# EAGLE board Qi-Receiver1.2 (EAGLE 9.6.2)
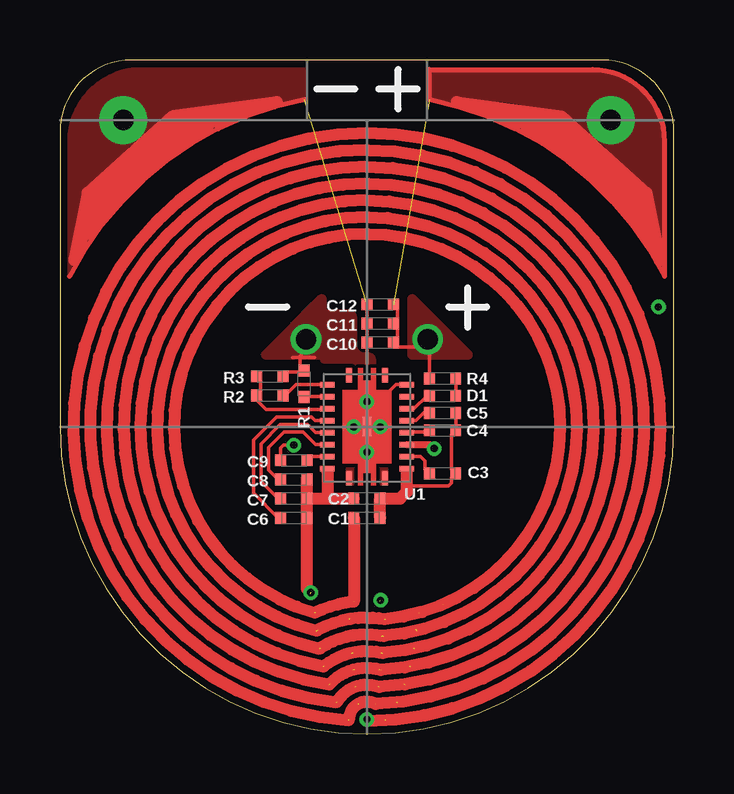
[diagram p0: board, top side]
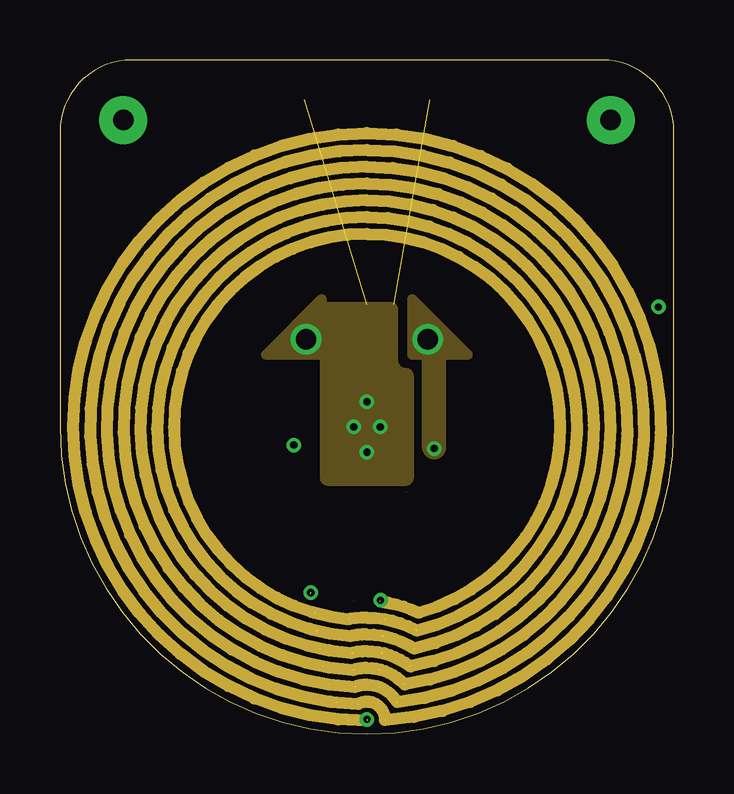
[diagram p1: board, inner layer Route2]
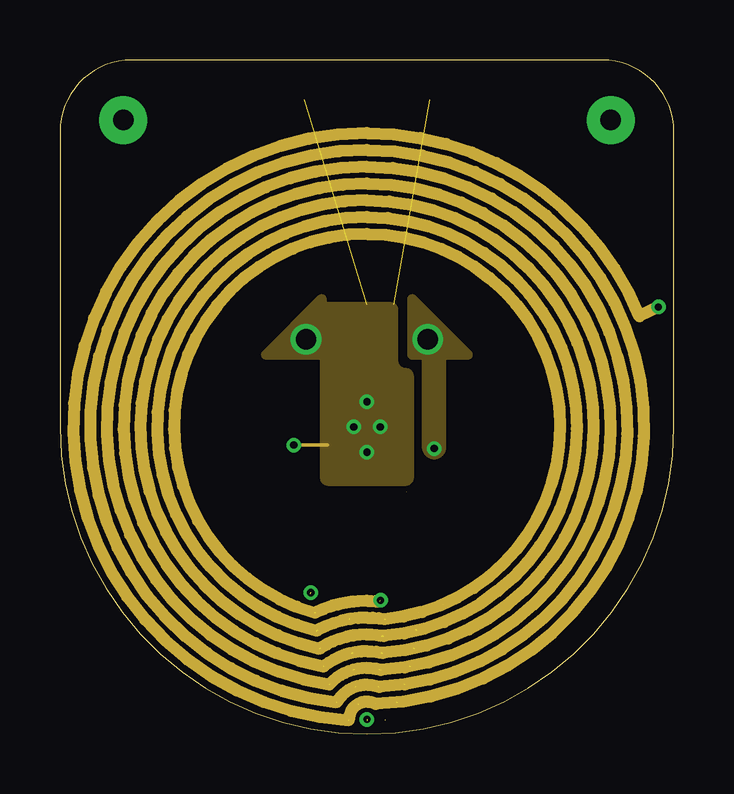
[diagram p2: board, inner layer Route15]
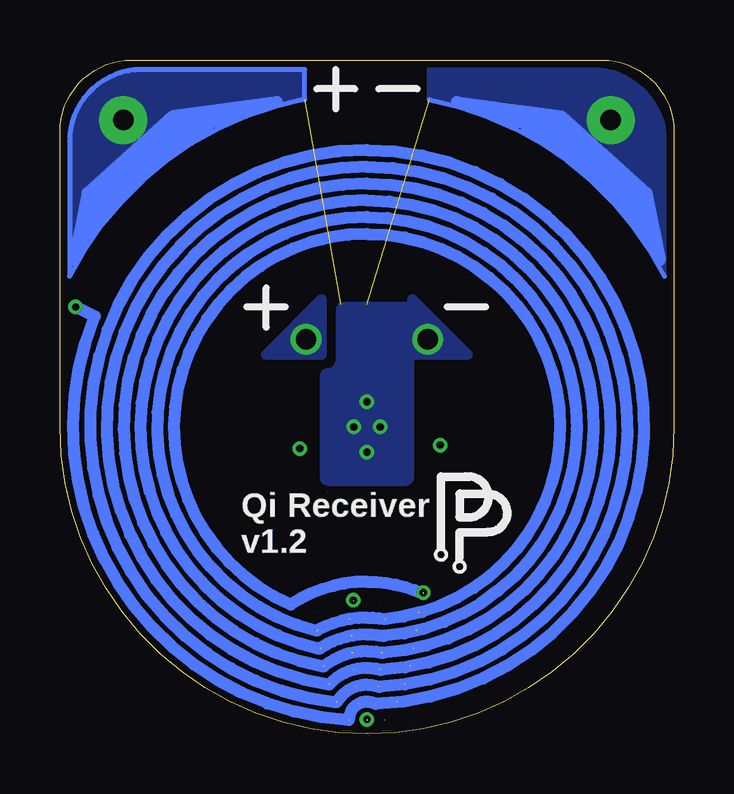
[diagram p3: board, bottom side, seen from below]

Size 25.6 x 28.1 mm. Coordinates in mm from the lower left corner, seen from the top.
Outline: 25.6,12.8 25.6,25.1 arc90 22.6,28.1 3,28.1 arc90 0,25.1 0,12.8 arc90 12.8,0 arc90 25.6,12.8
Copper layers (1+2*15+16): Top 0.035mm / dielectric 10mil / Route2 0.035mm / dielectric 40mil / Route15 0.035mm / dielectric 10mil / Bottom 0.035mm
Design rules "PCBWay_Rigid4Layer": minimum track width 6mil, minimum drill 0.3mm, track to track 6mil, track to pad 6mil, pad to pad 6mil, via to via 6mil, smd to smd 6mil, copper to edge 0.3mm, drill to drill 6mil, minimum pad ring 6mil, minimum via ring 6mil, stop-mask expansion 0.05mm, vias tented up to drill 2mil, thermal gap 10mil

## Footprints (pad centres in the part's own frame; a part is rotated, then mirrored left to right if it is on the bottom)
0402-SMT = smd 0.5 x 0.5: P$1 -0.55,0; P$2 0.55,0
BQ51013A = smd 0.6 x 0.24: AC1 -1.65,1.75; AC2 1.65,1.75; AD -1.65,-1.75; AD-EN -1.65,-1.25; BOOT1 -1.65,1.25; BOOT2 1.65,0.75; CHG -1.65,-0.75; CLMP1 -1.65,0.25; CLMP2 1.65,0.25; COM1 -1.65,-0.25; COM2 1.65,-0.25; FOD 1.65,-0.75; ILIM 1.65,-1.75; OUT -1.65,0.75; RECT 1.65,1.25; TS-CTRL 1.65,-1.25 | smd 0.24 x 0.6: EN1 -0.75,-2.15; EN2 0.75,-2.15; PGND1 -0.75,2.15; PGND20 0.75,2.15 | smd 0.4 x 0.8: THERM 0,0

## Placement (x,y rotation side)
C1  TBD  [0402-SMT]  12.8,9.01 180 top
C2  TBD  [0402-SMT]  12.8,9.81 180 top
C3  10nF  [0402-SMT]  15.95,10.86 180 top
C4  470nF  [0402-SMT]  15.95,12.66 180 top
C5  47nF  [0402-SMT]  15.95,13.39 180 top
C6  47nF  [0402-SMT]  9.75,9.01 180 top
C7  470nF  [0402-SMT]  9.75,9.81 180 top
C8  10nF  [0402-SMT]  9.75,10.61 180 top
C9  10uF  [0402-SMT]  9.75,11.41 180 top
C10  TBD  [0402-SMT]  13.35,16.31 0 top
C11  TBD  [0402-SMT]  13.35,17.11 0 top
C12  TBD  [0402-SMT]  13.35,17.91 0 top
D1  0402-LED  [0402-SMT]  15.95,14.1 180 top
R1  10kΩ  [0402-SMT]  10.18,14.6 270 top
R2  140Ω  [0402-SMT]  8.75,14.11 0 top
R3  140Ω  [0402-SMT]  8.75,14.91 180 top
R4  1000Ω  [0402-SMT]  15.95,14.82 180 top
U1  BQ51013A  [BQ51013A]  12.8,12.81 180 top

## Library data of the parts
C1-C12 D1 R1-R4 U1 = Qi_Charger

## Nets
AC1: C1.P$1 C2.P$1 C3.P$1 C4.P$1 C5.P$1 U1.AC1
AC2: C1.P$2 C2.P$2 C6.P$1 C7.P$1 C8.P$1 U1.AC2
BOOT1: C3.P$2 U1.BOOT1
BOOT2: C8.P$2 U1.BOOT2
CHG: D1.P$2 U1.CHG
CLMP1: C4.P$2 U1.CLMP1
CLMP2: C7.P$2 U1.CLMP2
COM1: C5.P$2 U1.COM1
COM2: C6.P$2 U1.COM2
FOD: R2.P$1 R3.P$2 U1.FOD
GND: C9.P$2 C10.P$1 C11.P$1 C12.P$1 R1.P$1 R3.P$1 U1.AD U1.PGND1 U1.PGND20 U1.THERM
ILIM: R2.P$2 U1.ILIM
N$1: R1.P$2 U1.TS-CTRL
N$2: D1.P$1 R4.P$1
OUT: C10.P$2 C11.P$2 C12.P$2 R4.P$2 U1.OUT
RECT: C9.P$1 U1.RECT

## Tracks (layer width: path | path; a pad name or v marks a point on that pad's centre or on a via)
AC1  (1 unrouted)
  Top 0.152: C5.P$1 C4.P$1 16.32,12.49 16.32,11.04 C3.P$1 16.32,10.69 16.32,10.47 16.2,10.35 14.5,10.35 14.45,10.4 | U1.AC1 14.45,10.93
  Top 0.5: 14.45,10.08 14.18,9.81 C2.P$1 C1.P$1 | 14.45,10.93 14.45,10.4 14.45,10.09
AC2  (via drill 0.3)  (60 unrouted)
  Top 0.152: U1.AC2 11.15,10.93
  Top 0.5: 11.15,10.93 11.15,9.81 C2.P$2 C7.P$1 | C1.P$2 12.25,5.52 | 12.8,0.55 arc180 12.8,25.05 arc176 12.05,0.57 | 12.05,0.58 arc-92 12.8,1.35 arc-28 13.15,1.26 | 11.56,1.35 arc-59 12.8,2.05 arc-18 13.26,1.98 | 11.25,2.09 arc-46 12.8,2.75 arc-14 13.31,2.69 | 11.02,2.83 arc-39 12.8,3.45 arc-12 13.39,3.39 | 10.87,3.58 arc-33 12.8,4.15 arc-10 13.41,4.1 | 10.76,4.33 arc-29 12.8,4.85 arc-10 13.53,4.79 | 13.16,1.25 arc178 12.8,24.35 arc174 11.54,1.32 | 13.3,1.96 arc177 12.8,23.65 arc172 11.22,2.06 | 13.38,2.67 arc177 12.8,22.95 arc170 10.98,2.81 | 13.45,3.38 arc176 12.8,22.25 arc168 10.84,3.56 | 13.49,4.08 arc175 12.8,21.55 arc166 10.71,4.3 | 13.54,4.79 arc175 12.8,20.85 arc164 10.62,5.05 | 12.25,5.52 arc20 10.63,5.05 | v10.46,5.89 10.3,6.05 C6.P$1 C7.P$1 | C7.P$1 C8.P$1
  Route2 0.5: 12.8,0.55 arc-180 12.8,25.05 arc-176 13.55,0.57 | 13.55,0.58 arc92 12.8,1.35 arc28 12.45,1.26 | 14.04,1.35 arc59 12.8,2.05 arc18 12.34,1.98 | 14.35,2.09 arc46 12.8,2.75 arc14 12.29,2.69 | 14.58,2.83 arc39 12.8,3.45 arc12 12.21,3.39 | 14.73,3.58 arc33 12.8,4.15 arc10 12.19,4.1 | 14.84,4.33 arc29 12.8,4.85 arc10 12.07,4.79 | 12.44,1.25 arc-178 12.8,24.35 arc-174 14.06,1.32 | 12.29,1.96 arc-177 12.8,23.65 arc-172 14.38,2.06 | 12.22,2.67 arc-177 12.8,22.95 arc-170 14.62,2.81 | 12.15,3.38 arc-176 12.8,22.25 arc-168 14.77,3.56 | 12.11,4.08 arc-175 12.8,21.55 arc-166 14.89,4.3 | 12.05,4.79 arc-175 12.8,20.85 arc-164 14.97,5.05 | 13.35,5.52 arc-20 14.96,5.05
  Route15 0.5: 10.65,5.06 arc-26 12.8,5.55 arc-6 13.35,5.52 | 12.05,0.58 arc-92 12.8,1.35 arc-28 13.15,1.26 | 11.56,1.35 arc-59 12.8,2.05 arc-18 13.26,1.98 | 11.25,2.09 arc-46 12.8,2.75 arc-14 13.31,2.69 | 11.02,2.83 arc-39 12.8,3.45 arc-12 13.39,3.39 | 10.87,3.58 arc-33 12.8,4.15 arc-10 13.41,4.1 | 10.76,4.33 arc-29 12.8,4.85 arc-10 13.53,4.79 | 12.05,0.57 arc-176 12.8,25.05 arc-68 24.14,17.43 | 13.16,1.25 arc178 12.8,24.35 arc174 11.54,1.32 | 13.3,1.96 arc177 12.8,23.65 arc172 11.22,2.06 | 13.38,2.67 arc177 12.8,22.95 arc170 10.98,2.81 | 13.45,3.38 arc176 12.8,22.25 arc168 10.84,3.56 | 13.49,4.08 arc175 12.8,21.55 arc166 10.71,4.3 | 13.54,4.79 arc175 12.8,20.85 arc164 10.62,5.05 | 12.25,5.52 arc20 10.63,5.05 | v24.95,17.8 24.16,17.42
  Bottom 0.5: 13.55,0.58 arc92 12.8,1.35 arc28 12.45,1.26 | 14.04,1.35 arc59 12.8,2.05 arc18 12.34,1.98 | 14.35,2.09 arc46 12.8,2.75 arc14 12.29,2.69 | 14.58,2.83 arc39 12.8,3.45 arc12 12.21,3.39 | 14.73,3.58 arc33 12.8,4.15 arc10 12.19,4.1 | 14.84,4.33 arc29 12.8,4.85 arc10 12.07,4.79 | 12.44,1.25 arc-178 12.8,24.35 arc-174 14.06,1.32 | 12.29,1.96 arc-177 12.8,23.65 arc-172 14.38,2.06 | 12.22,2.67 arc-177 12.8,22.95 arc-170 14.62,2.81 | 12.15,3.38 arc-176 12.8,22.25 arc-168 14.77,3.56 | 12.11,4.08 arc-175 12.8,21.55 arc-166 14.89,4.3 | 12.05,4.79 arc-175 12.8,20.85 arc-157 15.97,5.4 | 13.55,0.57 arc109 24.15,17.41 v24.95,17.8 | 15.96,5.41 arc33 12.8,6.35 arc24 10.44,5.84
  other vias: 12.8,0.6 13.37,5.57
BOOT1
  Top 0.152: C3.P$2 15.22,11.04 15.22,11.38 15.04,11.56 U1.BOOT1
BOOT2
  Top 0.152: C8.P$2 9.1,10.61 8.7,11.01 8.7,11.94 9.35,12.59 10.12,12.59 10.65,12.06 U1.BOOT2
CHG
  Top 0.152: D1.P$2 15.3,14.1 14.77,13.56 U1.CHG
CLMP1
  Top 0.152: U1.CLMP1 14.47,12.59 15.32,12.59 C4.P$2
CLMP2
  Top 0.152: C7.P$2 9.1,9.81 8.38,10.53 8.38,12.09 9.19,12.9 10.32,12.9 10.65,12.56 U1.CLMP2
COM1
  Top 0.152: U1.COM1 14.84,13.06 15.16,13.39 C5.P$2
COM2
  Top 0.152: C6.P$2 9.1,9.01 8.06,10.05 8.06,12.25 9.03,13.21 10.49,13.21 10.64,13.06 U1.COM2
FOD
  Top 0.152: U1.FOD 11.12,13.53 8.6,13.53 8.2,13.93 R2.P$1 8.37,14.28 8.37,14.74 R3.P$2
GND  (via drill 0.3, 0.85, 0.85 pad 2)  (2 unrouted)
  Top 0.152: v9.75,12.04 9.33,12.04 9.2,11.91 C9.P$2 | C12.P$1 C11.P$1 C10.P$1 12.8,15.45 | U1.AD 14.02,14.56 13.54,14.09 | R3.P$1 9.47,15.09 10.11,15.09 R1.P$1 10,15.32 10,15.75 10.25,16 | 9.7,15.7 9.7,15.69 10.62,15.69
  Top 0.2: 10.2,26.45 10.2,26.45 arc-52 10.2,26.45 | 10.2,26.45 arc52 0.4,19.08
  Top 0.5: 9.05,26.35 4.7,25.75 1.15,22.55 0.6,19.75 1.7,22.6 4.95,25.45 7.8,26 4.85,24.95 1.9,22.15 1.25,20.85 2.55,22.6 4.4,24.15 6.15,25.25
  Route15 0.152: v9.75,12.04 11.15,12.04 11.15,12.05
  Bottom 0.2: 10.2,26.45 10.2,26.45 arc-52 10.2,26.45 | 10.2,26.44 arc52 0.4,19.07
  Bottom 0.5: 9.05,26.35 4.7,25.75 1.15,22.55 0.6,19.75 1.7,22.6 4.95,25.45 7.8,26 4.85,24.95 1.9,22.15 1.25,20.85 2.55,22.6 4.4,24.15 6.15,25.25
  other vias: 2.64,25.6 10.26,16.45 12.8,13.85 12.8,11.75 13.35,12.8 12.25,12.8
  pour Bottom: 10.2,26.45 10.2,27.7 3.4,27.7 arc90 0.4,24.7 0.4,19.08 arc-90 7.77,26.45
  pour Top: 10.2,26.45 10.2,27.7 3.4,27.7 arc90 0.4,24.7 0.4,19.08 arc-90 7.77,26.45
  pour Top: 10.77,18.27 8.45,15.95 arc135 8.59,15.61 10.91,15.61 arc90 11.11,15.81 11.11,18.13 arc135
  pour Bottom: 10.77,18.27 8.45,15.95 arc135 8.59,15.61 10.91,15.61 arc90 11.11,15.81 11.11,18.13 arc135
  pour Route15: 10.77,18.27 8.45,15.95 arc135 8.59,15.61 10.91,15.61 arc90 11.11,15.81 11.11,18.13 arc135
  pour Route2: 10.77,18.27 8.45,15.95 arc135 8.59,15.61 10.91,15.61 arc90 11.11,15.81 11.11,18.13 arc135
  pour Top (no thermals): 11.93,10.36 11.93,11.13 11.78,11.29 11.78,14.34 12.18,14.34 12.43,14.59 12.43,15.12 arc90 12.1,15.45 11.02,15.45 arc-90 10.85,15.62 10.31,15.62 10.31,17.18 10.84,17.7 12.05,17.7 arc-90 12.38,17.38 12.38,16.23 arc90 12.71,15.9 12.85,15.9 arc-90 13.18,15.57 13.18,14.59 13.43,14.34 13.82,14.34 13.82,11.29 13.67,11.13 13.67,10.36
  pour Bottom: 10.77,18 13.78,18 arc-90 14.1,17.68 14.1,15.57 arc90 14.43,15.25 arc-90 14.75,14.93 14.75,10.68 arc-90 14.43,10.35 11.18,10.35 arc-90 10.85,10.68 10.85,15.62 10.77,15.62
  pour Route15: 10.77,18 13.78,18 arc-90 14.1,17.68 14.1,15.57 arc90 14.43,15.25 arc-90 14.75,14.93 14.75,10.68 arc-90 14.43,10.35 11.18,10.35 arc-90 10.85,10.68 10.85,15.62 10.77,15.62
  pour Route2: 10.77,18 13.78,18 arc-90 14.1,17.68 14.1,15.57 arc90 14.43,15.25 arc-90 14.75,14.93 14.75,10.68 arc-90 14.43,10.35 11.18,10.35 arc-90 10.85,10.68 10.85,15.62 10.77,15.62
ILIM
  Top 0.152: R2.P$2 9.38,14.11 9.84,14.56 U1.ILIM
N$1
  Top 0.152: R1.P$2 10.19,14.06 U1.TS-CTRL
N$2
  Top 0.152: R4.P$1 D1.P$1
OUT  (via drill 0.3, 0.85, 0.85 pad 2)  (1 unrouted)
  Top 0.152: C12.P$2 14.07,17.74 14.07,17.28 C11.P$2 14.07,16.94 14.07,16.48 C10.P$2 13.9,16.14 14.79,16.14 | R4.P$2 15.4,16.39 v15.34,16.45
  Top 0.2: 15.4,26.45 15.4,27.7 22.2,27.7 arc-90 25.2,24.7 25.2,19.08 arc52 15.4,26.45
  Top 0.3: U1.OUT 15.44,12.06 v15.6,11.9
  Top 0.5: 16.55,26.35 20.9,25.75 24.45,22.55 25,19.75 23.9,22.6 20.65,25.45 17.8,26 20.75,24.95 23.7,22.15 24.35,20.85 23.05,22.6 21.2,24.15 19.45,25.25
  Bottom 0.2: 15.4,26.45 15.4,27.7 22.2,27.7 arc-90 25.2,24.7 25.2,19.08 arc52 15.4,26.45
  Bottom 0.5: 16.55,26.35 20.9,25.75 24.45,22.55 25,19.75 23.9,22.6 20.65,25.45 17.8,26 20.75,24.95 23.7,22.15 24.35,20.85 23.05,22.6 21.2,24.15 19.45,25.25
  other vias: 22.96,25.6
  pour Top: 15.4,26.45 15.4,27.7 22.2,27.7 arc-90 25.2,24.7 25.2,19.08 arc90 17.83,26.45
  pour Bottom: 15.4,26.45 15.4,27.7 22.2,27.7 arc-90 25.2,24.7 25.2,19.08 arc90 17.83,26.45
  pour Bottom: 14.83,18.27 17.15,15.95 arc-135 17.01,15.61 14.69,15.61 arc-90 14.49,15.81 14.49,18.13 arc-135
  pour Route15: 14.83,18.27 17.15,15.95 arc-135 17.01,15.61 14.69,15.61 arc-90 14.49,15.81 14.49,18.13 arc-135
  pour Route2: 14.83,18.27 17.15,15.95 arc-135 17.01,15.61 14.69,15.61 arc-90 14.49,15.81 14.49,18.13 arc-135
  pour Top: 14.83,18.27 17.15,15.95 arc-135 17.01,15.61 14.69,15.61 arc-90 14.49,15.81 14.49,18.13 arc-135
  pour Route2: 14.69,17.7 16.1,16.29 16.1,11.95 arc-90 15.6,11.45 arc-90 15.1,11.95 15.1,16.27 14.7,16.66
  pour Route15: 14.69,17.7 16.1,16.29 16.1,11.95 arc-90 15.6,11.45 arc-90 15.1,11.95 15.1,16.27 14.7,16.66
RECT
  Top 0.152: C9.P$1 10.45,11.56 U1.RECT

## Text on the board
bPlace: Qi Receiver / v1.2